# Altium PCB ZMBo.PcbDoc (part 1 of 3)
Units mil, origin at the board's own origin, x right, y up, seen from the top; angles counter-clockwise.
Board outline 6000 x 4000 mil, 4 copper layers (Top Layer, Groun Plane, Power Plane, Bottom Layer); 254 components, 259 nets, 1004 pads, 1790 vias.
Unrouted connection lines stored in the file: 212.
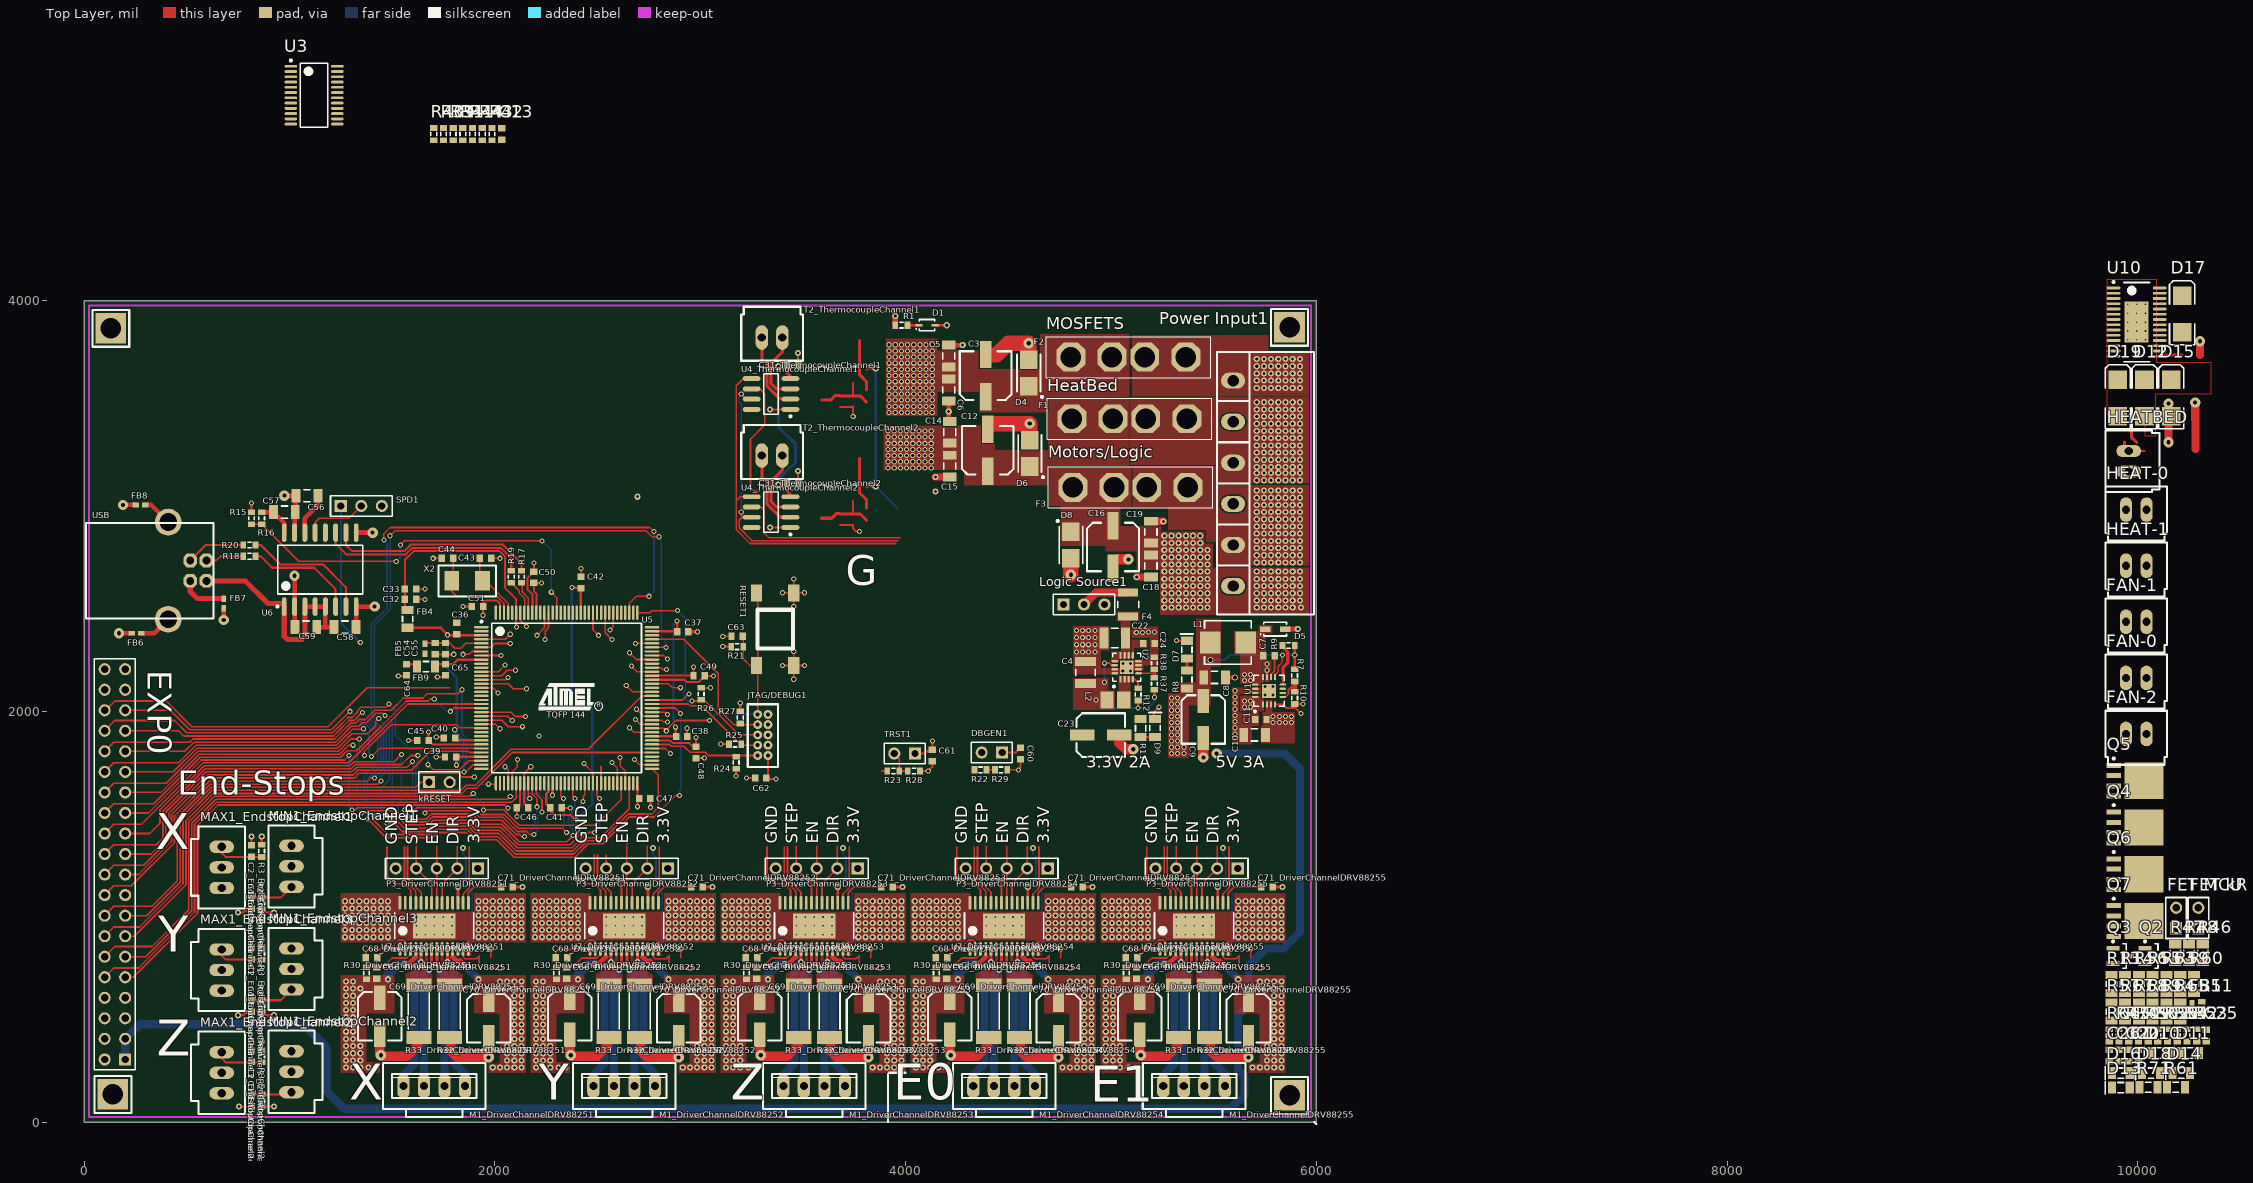
[diagram p0: Top Layer view]
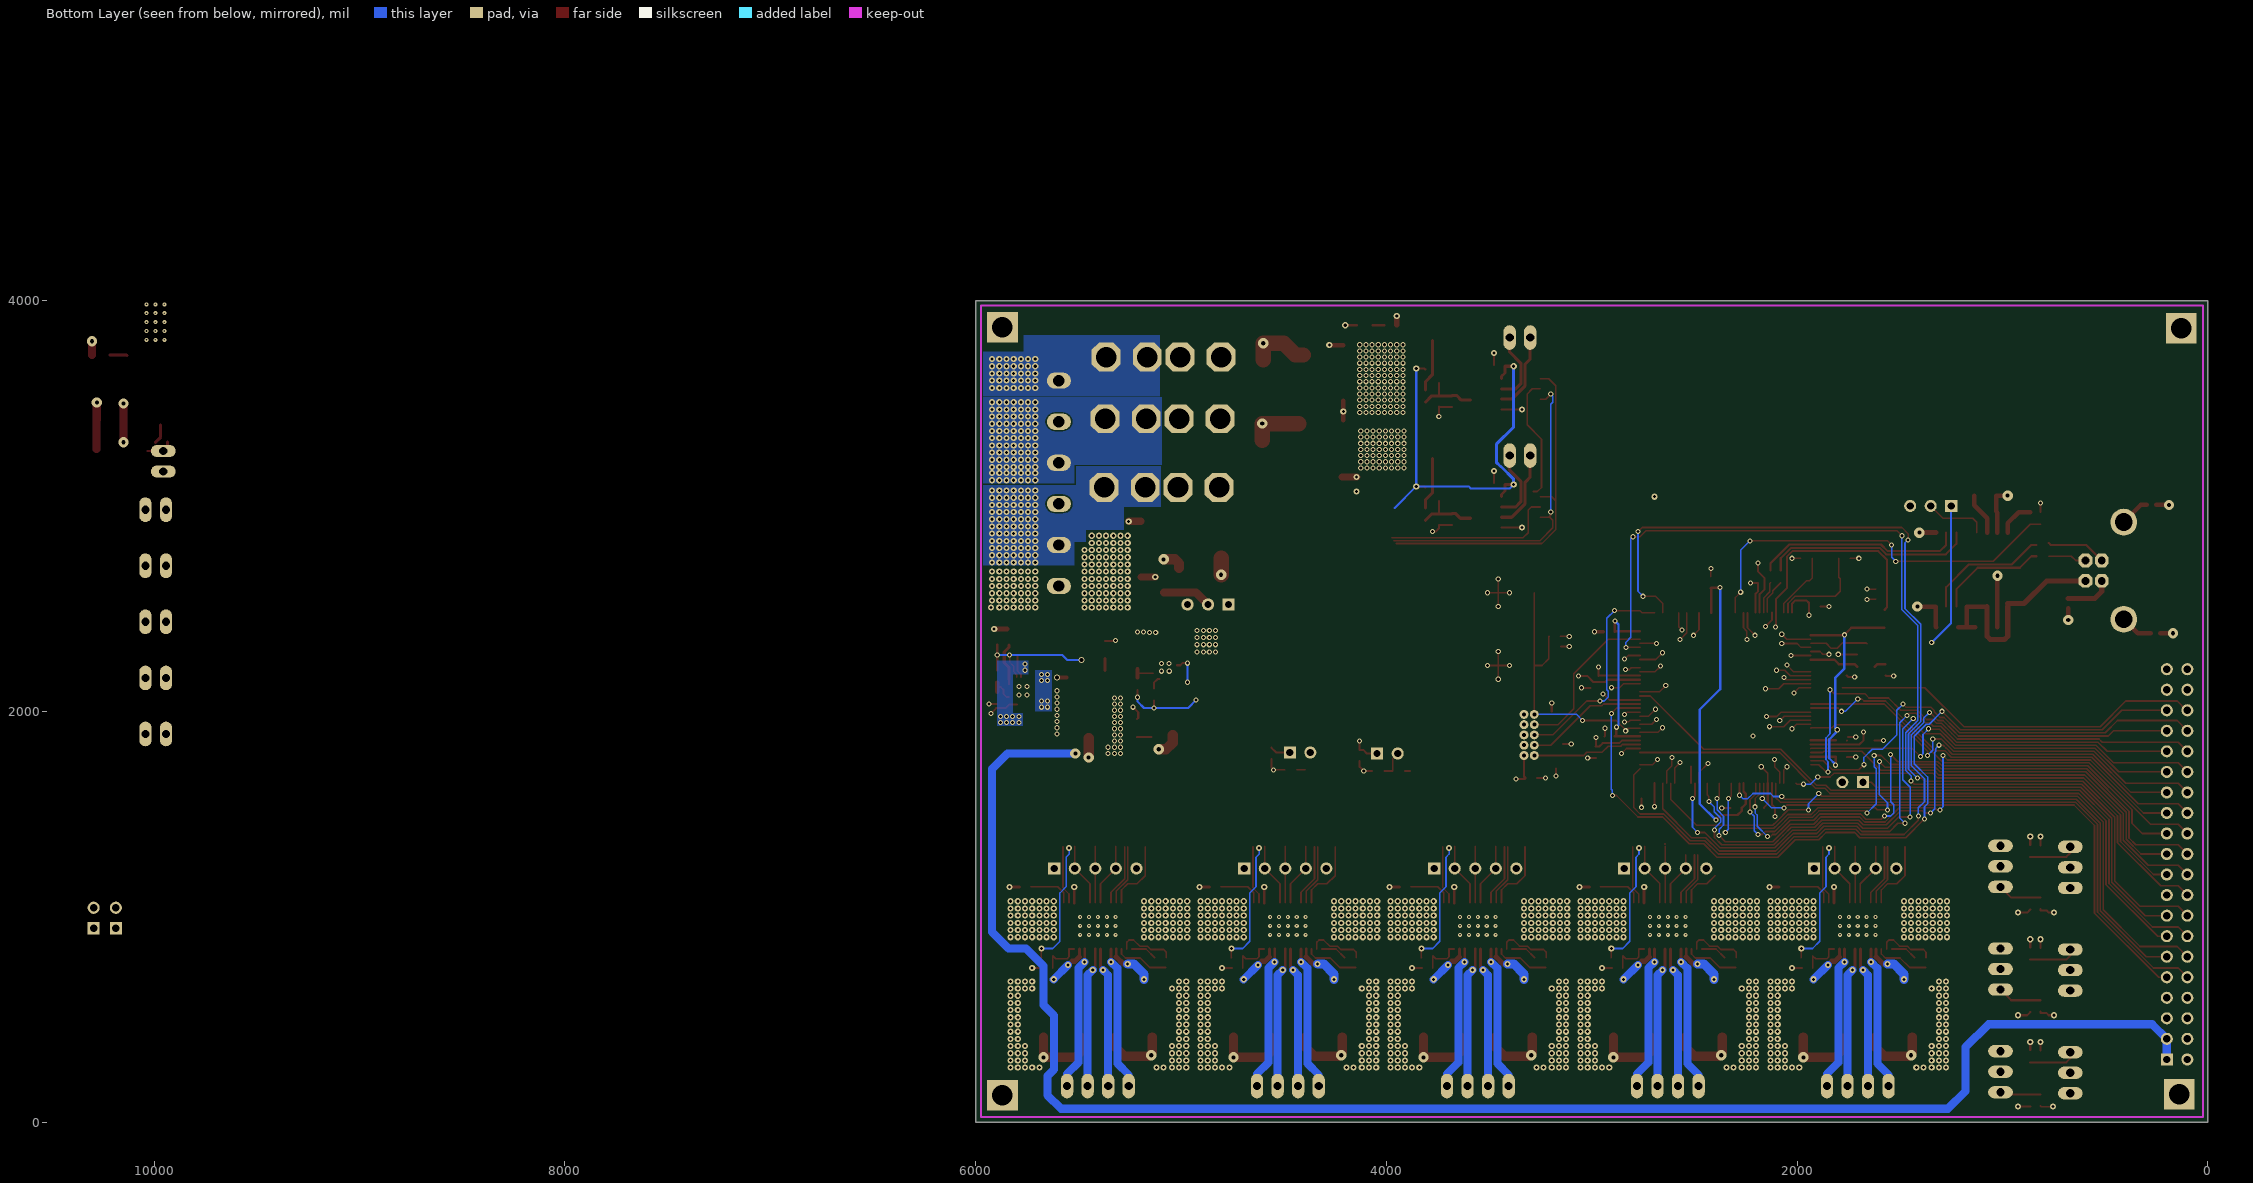
[diagram p1: Bottom Layer view, seen from below]
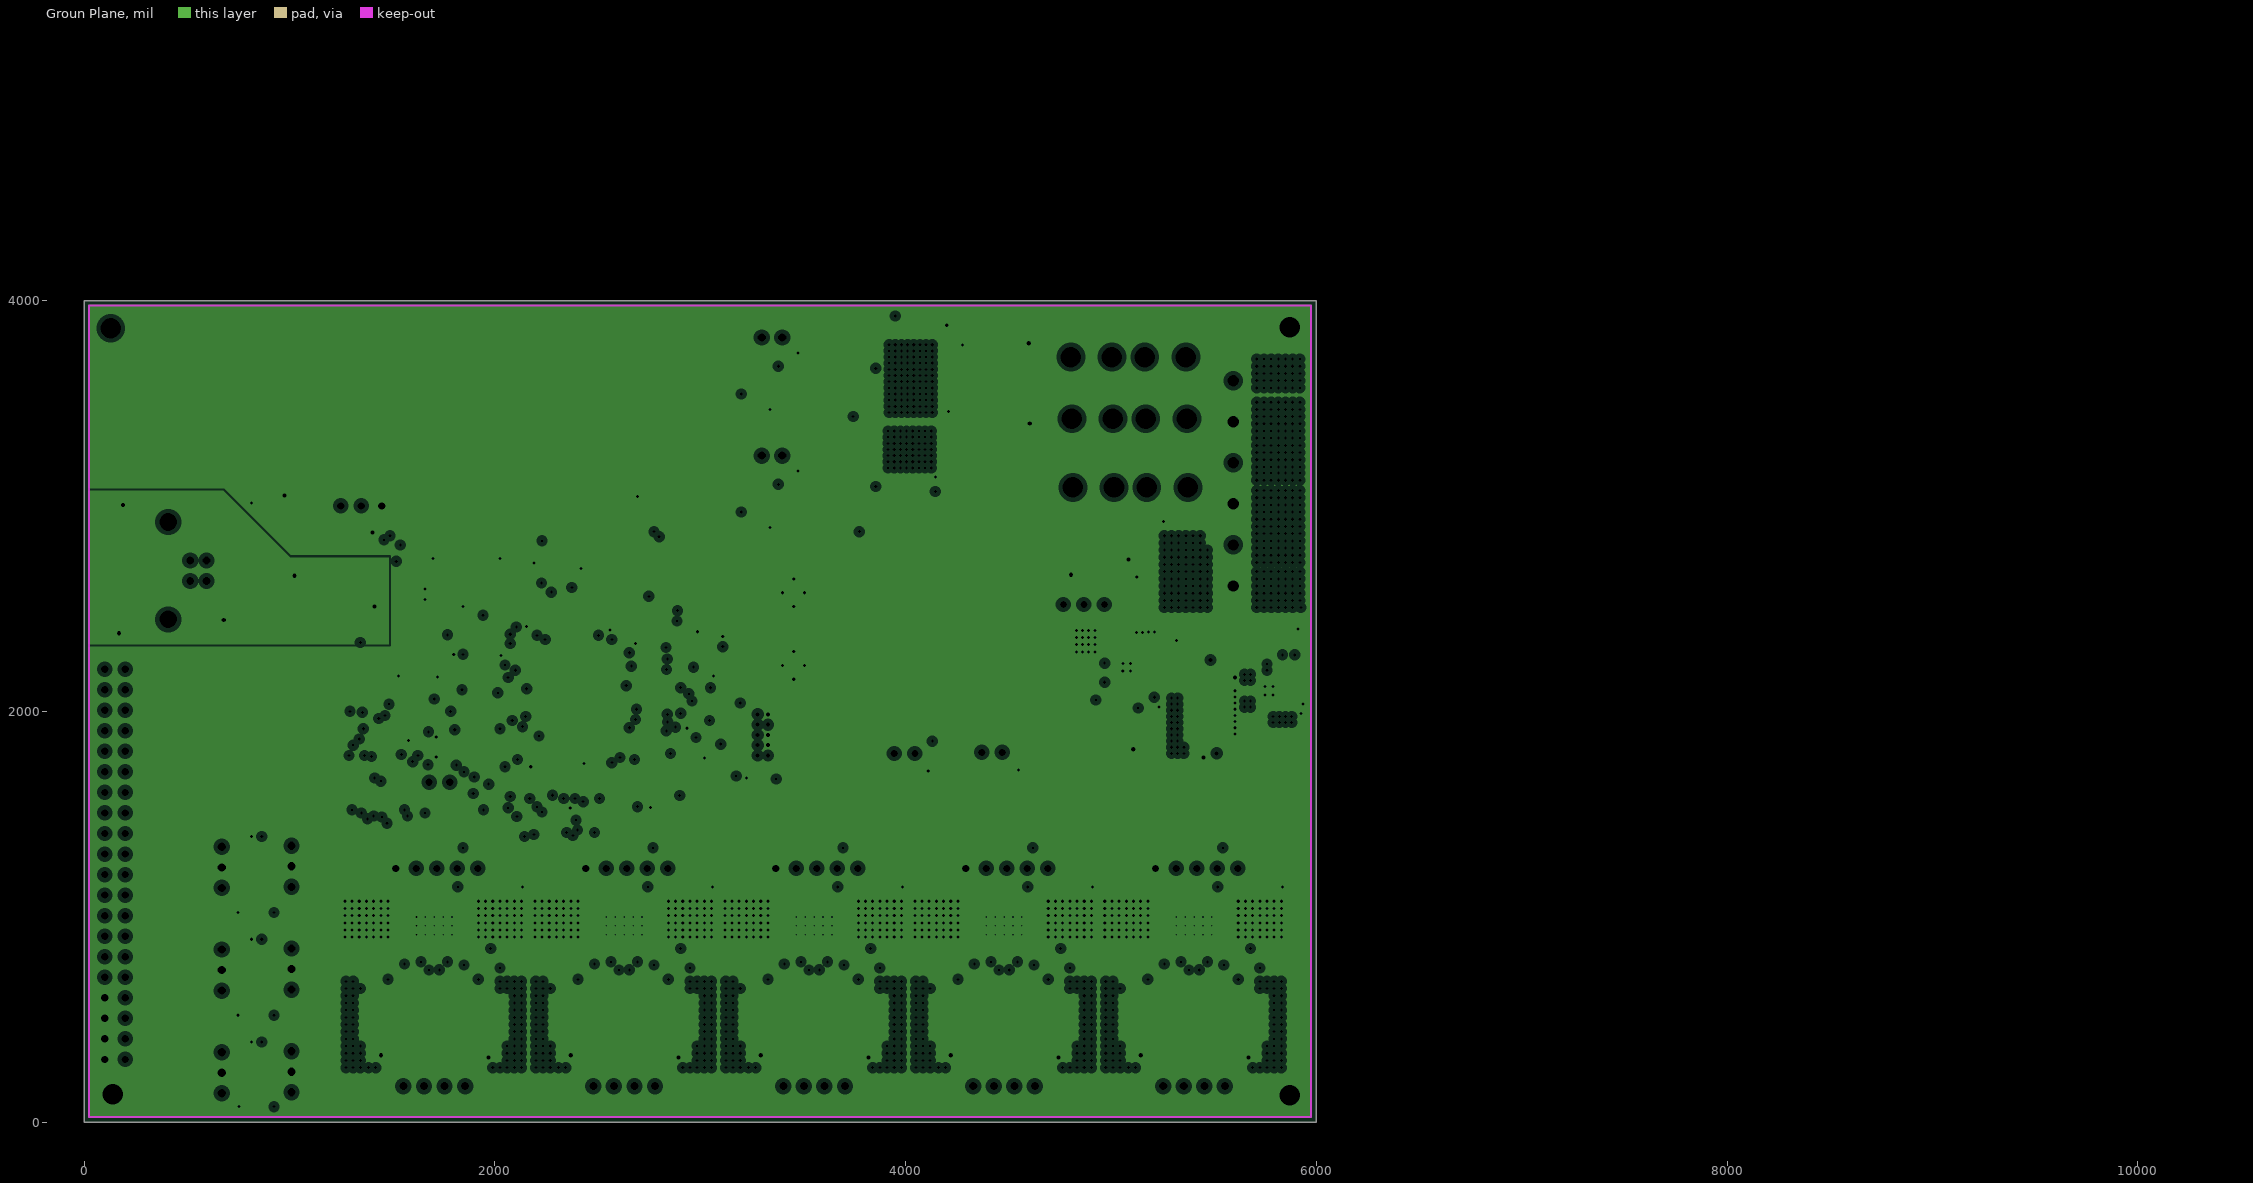
[diagram p2: Groun Plane, clearances drawn from the general rule]
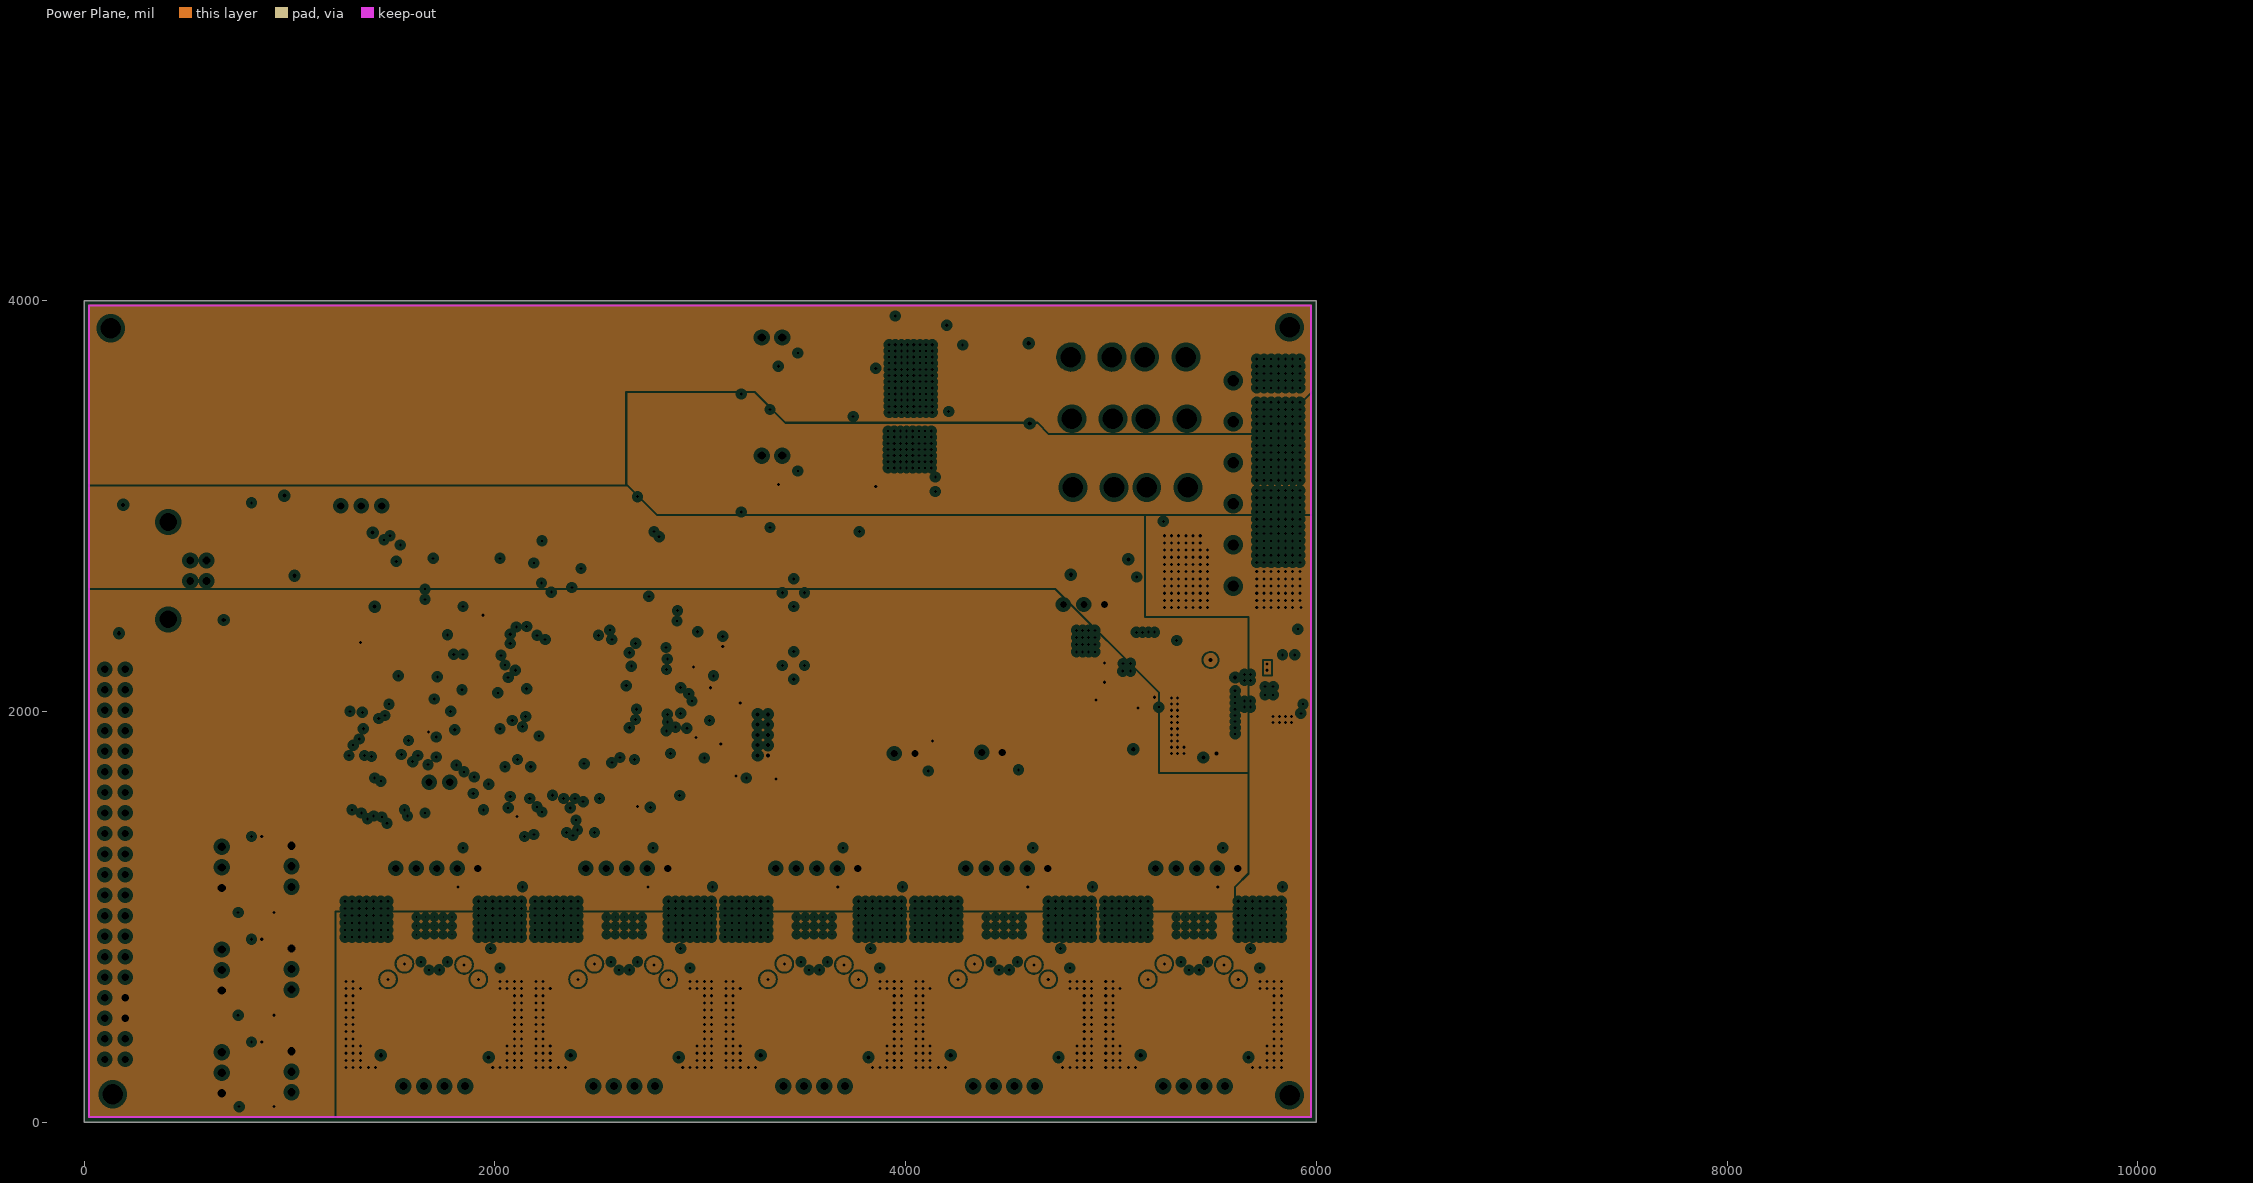
[diagram p3: Power Plane, clearances drawn from the general rule]

## Layer stack, top to bottom
Top Layer: signal copper 1.4
Dielectric: core 12.6, FR-4, Dk 4.8
Groun Plane: plane copper 1.4, net (Multiple Nets)
Dielectric: prepreg 12.6, FR-4, Dk 4.8
Power Plane: plane copper 1.4, net (Multiple Nets)
Dielectric: core 12.6, FR-4, Dk 4.8
Bottom Layer: signal copper 1.4

## Board outline
0,0 6000,0 6000,4000 0,4000

## Design rules (kind name [scope] priority, off if disabled: settings)
Clearance [All] p1: gap=6
ComponentClearance [All] p1: gap=0 collisioncheckmode=3 verticalgap=10 showdistances=FALSE
FanoutControl Fanout_SOIC [(InComponent('U8') AND InComponent('U7'))] p3: bgadir=Out bgaviamode=Centered fanoutstyle=Staggered fanoutdirection=Alternating viagrid=1 // Fanout_SOIC (Default Rule)
FanoutControl Fanout_Small [All] p4: bgadir=Out bgaviamode=Centered fanoutstyle=Auto fanoutdirection=Alternating viagrid=1 // Fanout_Small (Default Rule)
HoleSize [All] p1: absolutevalues=TRUE maxlimit=120 minlimit=1 maxpercent=80.000 minpercent=20.000
MinimumSolderMaskSliver [All] p1 off: minsoldermaskwidth=10
PlaneClearance [All] p1: clearance=20
PlaneConnect [All] p1: planeconnectstyle=Direct reliefexpansion=20 reliefentries=4 reliefconductorwidth=10 reliefairgap=10
PolygonConnect [All] p1: connectstyle=Direct reliefconductorwidth=45 reliefentries=4 polygonreliefangle="90 Angle" airgapwidth=10
RoomDefinition "ATSAM4E16EA_AU Main Controller" [InComponentClass('ATSAM4E16EA_AU Main Controller')] p1: confinementstyle=ConfineIn formatcopy=TRUE lockcomponents=TRUE outline 3175,3100 3175,2850 3900,2850 3900,1900 4700,1900 4700,1500 475,1500 475,2275 0,2275 0,3100
RoomDefinition Designator [InComponentClass('Designator')] p2: confinementstyle=ConfineIn formatcopy=TRUE lockcomponents=FALSE outline 4700,1700 5995,1700 5995,4000 4220,4001 3900,4001 3901,3823 3900,3100 4675,3100 4675,2975 4700,2975
RoomDefinition "U_Offboard Kinen Expansion" [InComponentClass('U_Offboard Kinen Expansion')] p3: confinementstyle=ConfineIn formatcopy=TRUE lockcomponents=TRUE outline 0,0 475,0 475,2275 0,2275
RoomDefinition ThermocoupleChannel2 [InComponentClass('ThermocoupleChannel2')] p4: confinementstyle=ConfineIn formatcopy=TRUE lockcomponents=FALSE outline 3525,2850 3525,3425 3175,3425 3175,2850
RoomDefinition ThermocoupleChannel1 [InComponentClass('ThermocoupleChannel1')] p5: confinementstyle=ConfineIn formatcopy=TRUE lockcomponents=FALSE outline 3525,3425 3525,4000 3175,4000 3175,3425
RoomDefinition "U_MOSFETs and Driver" [InComponentClass('U_MOSFETs and Driver')] p6: confinementstyle=ConfineIn formatcopy=TRUE lockcomponents=TRUE outline 9837.83,-120 12895,-120 12895,4110 9837.83,4110
RoomDefinition EndstopChannel3 [InComponentClass('EndstopChannel3')] p7: confinementstyle=ConfineIn formatcopy=TRUE lockcomponents=TRUE outline 475,500 1200,500 1200,1000 475,1000
RoomDefinition EndstopChannel2 [InComponentClass('EndstopChannel2')] p8: confinementstyle=ConfineIn formatcopy=TRUE lockcomponents=TRUE outline 475,0 1200,0 1200,500 475,500
RoomDefinition EndstopChannel1 [InComponentClass('EndstopChannel1')] p9: confinementstyle=ConfineIn formatcopy=TRUE lockcomponents=TRUE outline 475,1000 1200,1000 1200,1500 475,1500
RoomDefinition DriverChannelDRV88255 [InComponentClass('DriverChannelDRV88255')] p10: confinementstyle=ConfineIn formatcopy=TRUE lockcomponents=TRUE outline 4950,0 5875,0 5875,1350 4950,1350
RoomDefinition DriverChannelDRV88254 [InComponentClass('DriverChannelDRV88254')] p11: confinementstyle=ConfineIn formatcopy=TRUE lockcomponents=TRUE outline 4025,0 4950,0 4950,1350 4025,1350
RoomDefinition DriverChannelDRV88253 [InComponentClass('DriverChannelDRV88253')] p12: confinementstyle=ConfineIn formatcopy=TRUE lockcomponents=TRUE outline 3100,0 4025,0 4025,1350 3100,1350
RoomDefinition DriverChannelDRV88252 [InComponentClass('DriverChannelDRV88252')] p13: confinementstyle=ConfineIn formatcopy=TRUE lockcomponents=TRUE outline 2175,0 3100,0 3100,1350 2175,1350
RoomDefinition DriverChannelDRV88251 [InComponentClass('DriverChannelDRV88251')] p14: confinementstyle=ConfineIn formatcopy=TRUE lockcomponents=TRUE outline 1250,0 2175,0 2175,1350 1250,1350
RoutingVias [All] p1: holewidth=15 width=25 viastyle="Through Hole" minholewidth=15 minwidth=25 maxholewidth=28 maxwidth=50
SilkToSilkClearance [All] p1 off: silktosilkclearance=10
SilkToSolderMaskClearance SilkscreenOverComponentPads [IsPad] p1 off: minsilkscreentomaskgap=10 clearancetoexposedcopper=TRUE
SolderMaskExpansion [All] p1: expansion=4
Width [All] p1: maxlimit=200 minlimit=6 preferedwidth=6 minimp=50.000000 maximp=50.000000 favimp=50.000000
19 further rules are at their usual default settings.

## Classes and differential pairs
component class "U_MOSFETs and Driver": C17 C20 C21 C25 C26 D10 D11 D12 D13 D14 D15 D16 D17 D18 D19 FAN-0 FAN-1 FAN-2 FB1 "FET kRESET" "FET MCU RESET" HEAT-0 HEAT-1 HEATBED Q2 Q3 Q4 Q5 Q6 Q7 R13 R14 R45 R46 R47 R48 R49 R50 R51 R52 R53 R54 R55 R56 R57 R58 R59 R60 R61 R62 R63 R64 R65 R66 R67 R68 R69 R70 R71 U10
channel class "Thermocouple Channel": ThermocoupleChannel1 ThermocoupleChannel2
channel class "Endstop Channel": EndstopChannel1 EndstopChannel2 EndstopChannel3
channel class "Driver Channel DRV8825": DriverChannelDRV88251 DriverChannelDRV88252 DriverChannelDRV88253 DriverChannelDRV88254 DriverChannelDRV88255
net class OVREFBUS[1..2]: OVREF1 OVREF2
component class ThermocoupleChannel2: C31_ThermocoupleChannel2 T2_ThermocoupleChannel2 U4_ThermocoupleChannel2
component class ThermocoupleChannel1: C31_ThermocoupleChannel1 T2_ThermocoupleChannel1 U4_ThermocoupleChannel1
component class EndstopChannel3: C1_EndstopChannel3 C2_EndstopChannel3 MAX1_EndstopChannel3 MIN1_EndstopChannel3 R2_EndstopChannel3 R3_EndstopChannel3
component class EndstopChannel2: C1_EndstopChannel2 C2_EndstopChannel2 MAX1_EndstopChannel2 MIN1_EndstopChannel2 R2_EndstopChannel2 R3_EndstopChannel2
component class EndstopChannel1: C1_EndstopChannel1 C2_EndstopChannel1 MAX1_EndstopChannel1 MIN1_EndstopChannel1 R2_EndstopChannel1 R3_EndstopChannel1
component class DriverChannelDRV88255: C66_DriverChannelDRV88255 C68_DriverChannelDRV88255 C69_DriverChannelDRV88255 C70_DriverChannelDRV88255 C71_DriverChannelDRV88255 M1_DriverChannelDRV88255 P3_DriverChannelDRV88255 R30_DriverChannelDRV88255 R32_DriverChannelDRV88255 R33_DriverChannelDRV88255 U7_DriverChannelDRV88255
component class DriverChannelDRV88254: C66_DriverChannelDRV88254 C68_DriverChannelDRV88254 C69_DriverChannelDRV88254 C70_DriverChannelDRV88254 C71_DriverChannelDRV88254 M1_DriverChannelDRV88254 P3_DriverChannelDRV88254 R30_DriverChannelDRV88254 R32_DriverChannelDRV88254 R33_DriverChannelDRV88254 U7_DriverChannelDRV88254
component class DriverChannelDRV88253: C66_DriverChannelDRV88253 C68_DriverChannelDRV88253 C69_DriverChannelDRV88253 C70_DriverChannelDRV88253 C71_DriverChannelDRV88253 M1_DriverChannelDRV88253 P3_DriverChannelDRV88253 R30_DriverChannelDRV88253 R32_DriverChannelDRV88253 R33_DriverChannelDRV88253 U7_DriverChannelDRV88253
component class DriverChannelDRV88252: C66_DriverChannelDRV88252 C68_DriverChannelDRV88252 C69_DriverChannelDRV88252 C70_DriverChannelDRV88252 C71_DriverChannelDRV88252 M1_DriverChannelDRV88252 P3_DriverChannelDRV88252 R30_DriverChannelDRV88252 R32_DriverChannelDRV88252 R33_DriverChannelDRV88252 U7_DriverChannelDRV88252
component class DriverChannelDRV88251: C66_DriverChannelDRV88251 C68_DriverChannelDRV88251 C69_DriverChannelDRV88251 C70_DriverChannelDRV88251 C71_DriverChannelDRV88251 M1_DriverChannelDRV88251 P3_DriverChannelDRV88251 R30_DriverChannelDRV88251 R32_DriverChannelDRV88251 R33_DriverChannelDRV88251 U7_DriverChannelDRV88251
component class "ATSAM4E16EA_AU Main Controller": C13 C32 C33 C36 C37 C38 C39 C40 C41 C42 C43 C44 C45 C46 C47 C48 C49 C50 C51 C54 C55 C56 C57 C58 C59 C60 C61 C62 C63 C64 C65 DBGEN1 FB4 FB5 FB6 FB7 FB8 FB9 JTAG/DEBUG1 kRESET R15 R16 R17 R18 R19 R20 R21 R22 R23 R24 R25 R26 R27 R28 R29 R31 R39 R40 R41 R42 R43 R44 RESET1 SPD1 TRST1 U3 U5 U6 USB X2
component class Designator: C3 C4 C5 C6 C7 C8 C9 C10 C11 C12 C14 C15 C16 C18 C19 C22 C23 C24 D1 D4 D5 D6 D7 D8 D9 F1 F2 F3 F4 L1 L2 "Logic Source1" "Power Input1" R1 R7 R8 R9 R10 R11 R12 R37 R38 U1 U2
component class "U_Offboard Kinen Expansion": EXP0
net class MAX_ES_BUS[1..3]: MAX_ES0
net class MIN_ES_BUS[1..3]: MIN_ES0
net class MISO[1..2]: MISO0 MISO1 MISO2
net class SCLK[1..2]: SCLK0 SCLK1 SCLK2
net class TC_CS_BUS[1..2]: TC_CS0
net class THERM_ANBUS[1..2]: THERM_AN0

## Components (designator, comment, footprint, x,y, rotation, side; value= is the part's Value field where it differs from the comment)
C1_EndstopChannel1 "0603" 1608[0603] 815,1065.47 r270 top (schematic designator C1)
C1_EndstopChannel2 "0603" 1608[0603] 815,105.47 r270 top (schematic designator C1)
C1_EndstopChannel3 "0603" 1608[0603] 815,565.47 r270 top (schematic designator C1)
C2_EndstopChannel1 "0603" 1608[0603] 815,1320 r90 top (schematic designator C2)
C2_EndstopChannel2 "0603" 1608[0603] 815,320 r90 top (schematic designator C2)
C2_EndstopChannel3 "0603" 1608[0603] 815,820 r90 top (schematic designator C2)
C3 "VAS D" "Panasonic VS D" 4390,3635 r270 top
C4 "1210" C1210 4875.58,2189.31 r90 top
C5 "1206" C1206 4210,3730 r270 top
C6 "1206" C1206 4210,3565 r90 top
C7 "Cap Semi" 1608[0603] 5770,2270 r0 top
C8 "Cap Semi" C1206 5505,2165 r180 top
C9 "VS C" "Panasonic VS C" 5565,1840 r90 top
C10 "Cap Semi" C1206 5700,1885 r0 top
C11 "Cap Semi" 1608[0603] 5730,1960 r0 top
C12 "VAS D" "Panasonic VS D" 4400,3271.02 r270 top
C13 "Cap Semi" 1608[0603] 2033.39,4810.79 r90 top
C14 "1206" C1206 4215,3358.66 r270 top
C15 "1206" C1206 4215,3193.66 r90 top
C16 "VAS D" "Panasonic VS D" 5010,2800 r90 top
C17 "0603" 1608[0603] 9908.7,323.33 r90 top
C18 "1206" C1206 5195,2707.36 r90 top
C19 "1206" C1206 5195,2872.36 r270 top
C20 "0603" 1608[0603] 9955.94,323.33 r90 top
C21 "0603" 1608[0603] 10003.19,323.33 r90 top
C22 "1210" C1210 5018.58,2356.31 r180 top
C23 "VS C" "Panasonic VS C" 5070.58,1999.31 r180 top
C24 "0603" 1608[0603] 5185.58,2330.31 r180 top
C25 "0603" 1608[0603] 10333.9,421.76 r90 top
C26 "0603" 1608[0603] 9861.46,323.33 r90 top
C31_ThermocoupleChannel1 "Cap Semi" 1608[0603] 3450.51,3685 r180 top (schematic designator C31)
C31_ThermocoupleChannel2 "Cap Semi" 1608[0603] 3450.51,3110 r180 top (schematic designator C31)
C32 "0603" 1608[0603] 1590,2545 r180 top
C33 "0603" 1608[0603] 1590,2595 r180 top
C36 "0603" 1608[0603] 1815,2402.56 r270 top
C37 "0603" 1608[0603] 2915,2387.56 r180 top
C38 "0603" 1608[0603] 2910,1877.56 r180 top
C39 "0603" 1608[0603] 1785,1777.56 r0 top
C40 "0603" 1608[0603] 1780,1870 r0 top
C41 "0603" 1608[0603] 2297.44,1530 r180 top
C42 "0603" 1608[0603] 2420,2627.56 r270 top
C43 "0603" 1608[0603] 1955,2745 r180 top
C44 "0603" 1608[0603] 1770,2745 r0 top
C45 "0603" 1608[0603] 1650,1857.56 r0 top
C46 "0603" 1608[0603] 2135,1530 r180 top
C47 "0603" 1608[0603] 2730,1575 r180 top
C48 "0603" 1608[0603] 2980,1800 r90 top
C49 "0603" 1608[0603] 2995,2172.56 r180 top
C50 "0603" 1608[0603] 2190,2652.56 r270 top
C51 "0603" 1608[0603] 1915,2510 r0 top
C54 "0603" 1608[0603] 1710,2305 r90 top
C55 "0603" 1608[0603] 1760,2305 r90 top
C56 "1206" C1206 1085,3050 r0 top
C57 "1206" C1206 975,2970 r180 top
C58 "1206" C1206 1270,2410 r180 top
C59 "1206" C1206 1080,2410 r0 top
C60 "Cap Semi" 1608[0603] 4560,1795 r90 top
C61 "Cap Semi" 1608[0603] 4130.47,1784.53 r90 top
C62 "Cap Semi" 1608[0603] 3295,1675 r0 top
C63 "Cap Semi" 1608[0603] 3180,2365 r0 top
C64 "0603" 1608[0603] 1570,2202.56 r90 top
C65 "0603" 1608[0603] 1760,2202.56 r90 top
C66_DriverChannelDRV88251 "0603" 1608[0603] 1425,725 r90 top (schematic designator C66)
C66_DriverChannelDRV88252 "0603" 1608[0603] 2350,725 r90 top (schematic designator C66)
C66_DriverChannelDRV88253 "0603" 1608[0603] 3275,725 r90 top (schematic designator C66)
C66_DriverChannelDRV88254 "0603" 1608[0603] 4200,725 r90 top (schematic designator C66)
C66_DriverChannelDRV88255 "0603" 1608[0603] 5125,725 r90 top (schematic designator C66)
C68_DriverChannelDRV88251 "0603" 1608[0603] 1400,800 r180 top (schematic designator C68)
C68_DriverChannelDRV88252 "0603" 1608[0603] 2325,800 r180 top (schematic designator C68)
C68_DriverChannelDRV88253 "0603" 1608[0603] 3250,800 r180 top (schematic designator C68)
C68_DriverChannelDRV88254 "0603" 1608[0603] 4175,800 r180 top (schematic designator C68)
C68_DriverChannelDRV88255 "0603" 1608[0603] 5100,800 r180 top (schematic designator C68)
C69_DriverChannelDRV88251 "VS C" "Panasonic VS C" 1555,395 r90 top (schematic designator C69)
C69_DriverChannelDRV88252 "VS C" "Panasonic VS C" 2480,395 r90 top (schematic designator C69)
C69_DriverChannelDRV88253 "VS C" "Panasonic VS C" 3405,395 r90 top (schematic designator C69)
C69_DriverChannelDRV88254 "VS C" "Panasonic VS C" 4330,395 r90 top (schematic designator C69)
C69_DriverChannelDRV88255 "VS C" "Panasonic VS C" 5255,395 r90 top (schematic designator C69)
C70_DriverChannelDRV88251 "VS C" "Panasonic VS C" 2085,385 r90 top (schematic designator C70)
C70_DriverChannelDRV88252 "VS C" "Panasonic VS C" 3010,385 r90 top (schematic designator C70)
C70_DriverChannelDRV88253 "VS C" "Panasonic VS C" 3935,385 r90 top (schematic designator C70)
C70_DriverChannelDRV88254 "VS C" "Panasonic VS C" 4860,385 r90 top (schematic designator C70)
C70_DriverChannelDRV88255 "VS C" "Panasonic VS C" 5785,385 r90 top (schematic designator C70)
C71_DriverChannelDRV88251 "0603" 1608[0603] 2060,1145 r180 top (schematic designator C71)
C71_DriverChannelDRV88252 "0603" 1608[0603] 2985,1145 r180 top (schematic designator C71)
C71_DriverChannelDRV88253 "0603" 1608[0603] 3910,1145 r180 top (schematic designator C71)
C71_DriverChannelDRV88254 "0603" 1608[0603] 4835,1145 r180 top (schematic designator C71)
C71_DriverChannelDRV88255 "0603" 1608[0603] 5760,1145 r180 top (schematic designator C71)
D1 "SZMM3Z4V7T1G" SZMM3Z4V7T1G 4105,3880 r180 top
D4 "SK310A-TP" SK310A-TP 4600,3647.36 r270 top
D5 "PMEG1030EH_EJ" PMEG1030EH_EJ 5800,2400 r180 top
D6 "SK310A-TP" SK310A-TP 4605,3256.02 r270 top
D7 "LED2" "SM 0805 polarized" 5413.5,2380 r270 top
D8 "SK310A-TP" SK310A-TP 4805,2810 r90 top
D9 "LED2" "SM 0805 polarized" 5258.58,1998.31 r270 top
D10 "LED1" "SM 0805 polarized" 10026.87,380.35 r0 top
D11 "LED1" "SM 0805 polarized" 10173.85,380.35 r0 top
D12 "B240A-13-F" SMB 10032.72,3526.18 r90 top
D13 "LED1" "SM 0805 polarized" 9837.9,210.94 r0 top
D14 "LED1" "SM 0805 polarized" 10131.85,281.93 r0 top
D15 "B240A-13-F" SMB 10162.64,3526.18 r90 top
D16 "LED1" "SM 0805 polarized" 9837.9,281.93 r0 top
D17 "B240A-13-F" SMB 10215.79,3934.65 r90 top
D18 "LED1" "SM 0805 polarized" 9984.87,281.93 r0 top
D19 "B240A-13-F" SMB 9902.8,3526.18 r90 top
DBGEN1 "Header 2" HDR1X2 4470.39,1799.45 r180 top
EXP0 "Header 20X2" HDR2X20 200,305 r90 top locked
F1 "3522-2" 3522-2 5090,3425 r180 top
F2 "3522-2" 3522-2 5085,3725 r180 top
F3 "3522-2" 3522-2 5095,3090 r180 top
F4 "LittleFuse F1210" F1210_M 5083.58,2520.04 r90 top
FAN-0 "Molex 70543-02" 70543-02 9992.83,2162.64 r0 top
FAN-1 "Molex 70543-02" 70543-02 9992.83,2435.64 r0 top
FAN-2 "Molex 70543-02" 70543-02 9992.83,1889.64 r0 top
FB1 "BLM15HG601SN1D" BLM18PG121SN1D 10263.79,553.77 r90 top
FB4 "MH2029-300Y" "SM 0805 - gap trimmed" 1575,2450 r90 top
FB5 "BLM15HG601SN1D" BLM18PG121SN1D 1660,2305 r90 top
FB6 "BLM15HG601SN1D" BLM18PG121SN1D 255,2380 r0 top
FB7 "BLM15HG601SN1D" BLM18PG121SN1D 680,2525 r90 top
FB8 "BLM15HG601SN1D" BLM18PG121SN1D 275,3005 r0 top
FB9 "MH2029-300Y" "SM 0805 - gap trimmed" 1665,2217.56 r0 top
"FET kRESET" "Header 2" HDR1X2 10294.92,943.46 r90 top
"FET MCU RESET" "Header 2" HDR1X2 10187.05,943.46 r90 top
HEAT-0 "Molex 70543-02" 70543-02 9992.83,2981.64 r0 top
HEAT-1 "Molex 70543-02" 70543-02 9992.83,2708.64 r0 top
HEATBED "Molex 70543-02" 70543-02 9955.83,3217.64 r90 top
JTAG/DEBUG1 "S9015E-05-ND" S9015E-05-ND 3330,1985 r270 top
kRESET "Header 2" HDR1X2 1680,1655 r0 top
L1 "Inductor" CIP0530LR3R3 5570,2335 r180 top
L2 "VLS252012T-2R2M1R3" VLS252012T-2R2M1R3 5021.58,2054.31 r180 top
"Logic Source1" "Header 3" HDR1X3 4768.58,2520.04 r0 top
M1_DriverChannelDRV88251 "Molex 0705430003" 4POL254 1705,175 r0 top (schematic designator M1)
M1_DriverChannelDRV88252 "Molex 0705430003" 4POL254 2630,175 r0 top (schematic designator M1)
M1_DriverChannelDRV88253 "Molex 0705430003" 4POL254 3555,175 r0 top (schematic designator M1)
M1_DriverChannelDRV88254 "Molex 0705430003" 4POL254 4480,175 r0 top (schematic designator M1)
M1_DriverChannelDRV88255 "Molex 0705430003" 4POL254 5405,175 r0 top (schematic designator M1)
MAX1_EndstopChannel1 "Molex 70543-03" 70543-03 670,1240 r270 top (schematic designator MAX1)
MAX1_EndstopChannel2 "Molex 70543-03" 70543-03 670,240 r270 top (schematic designator MAX1)
MAX1_EndstopChannel3 "Molex 70543-03" 70543-03 670,740 r270 top (schematic designator MAX1)
MIN1_EndstopChannel1 "Molex 70543-03" 70543-03 1010,1245 r90 top (schematic designator MIN1)
MIN1_EndstopChannel2 "Molex 70543-03" 70543-03 1010,245 r90 top (schematic designator MIN1)
MIN1_EndstopChannel3 "Molex 70543-03" 70543-03 1010,745 r90 top (schematic designator MIN1)
P3_DriverChannelDRV88251 "Header 5" HDR1X5 1917.5,1235 r180 top (schematic designator P3)
P3_DriverChannelDRV88252 "Header 5" HDR1X5 2842.5,1235 r180 top (schematic designator P3)
P3_DriverChannelDRV88253 "Header 5" HDR1X5 3767.5,1235 r180 top (schematic designator P3)
P3_DriverChannelDRV88254 "Header 5" HDR1X5 4692.5,1235 r180 top (schematic designator P3)
P3_DriverChannelDRV88255 "Header 5" HDR1X5 5617.5,1235 r180 top (schematic designator P3)
"Power Input1" "con-phoenix-508" con-phoenix-508-6 5595,2610 r0 top
Q2 "IRML6346TRPBF" IRLML6346 10071.1,808.82 r0 top
Q3 "IRML6346TRPBF" IRLML6346 9915.59,808.82 r0 top
Q4 "PSMN7R0-60YS" PSMN7R0-60YS 9985.47,1434.21 r0 top
Q5 "PSMN7R0-60YS" PSMN7R0-60YS 9985.47,1661.77 r0 top
Q6 "PSMN7R0-60YS" PSMN7R0-60YS 9985.47,1206.65 r0 top
Q7 "PSMN7R0-60YS" PSMN7R0-60YS 9985.47,979.09 r0 top
R1 "Res3" J1-0603 3980,3880 r180 top
R2_EndstopChannel1 "0603" J1-0603 865,1065.47 r90 top (schematic designator R2)
R2_EndstopChannel2 "0603" J1-0603 865,105.47 r90 top (schematic designator R2)
R2_EndstopChannel3 "0603" J1-0603 865,565.47 r90 top (schematic designator R2)
R3_EndstopChannel1 "0603" J1-0603 865,1320.47 r270 top (schematic designator R3)
R3_EndstopChannel2 "0603" J1-0603 865,320.47 r270 top (schematic designator R3)
R3_EndstopChannel3 "0603" J1-0603 865,820.47 r270 top (schematic designator R3)
R7 "Res3" J1-0603 5895,2175 r90 top
R8 "Res3" "SM 0805 - gap trimmed" 5370,2155 r270 top
R9 "Res3" J1-0603 5865,2320 r180 top
R10 "Res3" J1-0603 5895,2065 r90 top
R11 "Res3" "SM 0805 - gap trimmed" 5144.58,1918.31 r90 top
R12 "0603" J1-0603 5132.58,2082.31 r270 top
R13 "0805" "SM 0805 - gap trimmed" 9871.36,671.94 r90 top
R14 "0805" "SM 0805 - gap trimmed" 9938.42,671.94 r90 top
R15 "0603" J1-0603 815,2940 r90 top
R16 "0603" J1-0603 865,2940 r90 top
R17 "0603" J1-0603 2130,2655 r90 top
R18 "0603" J1-0603 805,2755 r180 top
R19 "0603" J1-0603 2080,2655 r90 top
R20 "0603" J1-0603 805,2810 r180 top
R21 "Res3" J1-0603 3180,2315 r180 top
R22 "0603" J1-0603 4365,1715 r0 top
R23 "Res3" J1-0603 3940.47,1709.53 r0 top
R24 "0603" J1-0603 3175,1750 r270 top
R25 "0603" J1-0603 3170,1840 r180 top
R26 "0603" J1-0603 3005,2085 r90 top
R27 "0603" J1-0603 3195,1970 r90 top
R28 "0603" J1-0603 4040.47,1709.53 r180 top
R29 "0603" J1-0603 4465,1715 r0 top
R30_DriverChannelDRV88251 "0603" J1-0603 1375,725 r90 top (schematic designator R30)
R30_DriverChannelDRV88252 "0603" J1-0603 2300,725 r90 top (schematic designator R30)
R30_DriverChannelDRV88253 "0603" J1-0603 3225,725 r90 top (schematic designator R30)
R30_DriverChannelDRV88254 "0603" J1-0603 4150,725 r90 top (schematic designator R30)
R30_DriverChannelDRV88255 "0603" J1-0603 5075,725 r90 top (schematic designator R30)
R31 "Res3" J1-0603 1797.17,4810.79 r90 top
R32_DriverChannelDRV88251 "2512" Resistor2512 1780,540 r90 top (schematic designator R32)
R32_DriverChannelDRV88252 "2512" Resistor2512 2705,540 r90 top (schematic designator R32)
R32_DriverChannelDRV88253 "2512" Resistor2512 3630,540 r90 top (schematic designator R32)
R32_DriverChannelDRV88254 "2512" Resistor2512 4555,540 r90 top (schematic designator R32)
R32_DriverChannelDRV88255 "2512" Resistor2512 5480,540 r90 top (schematic designator R32)
R33_DriverChannelDRV88251 "2512" Resistor2512 1630,540 r90 top (schematic designator R33)
R33_DriverChannelDRV88252 "2512" Resistor2512 2555,540 r90 top (schematic designator R33)
R33_DriverChannelDRV88253 "2512" Resistor2512 3480,540 r90 top (schematic designator R33)
R33_DriverChannelDRV88254 "2512" Resistor2512 4405,540 r90 top (schematic designator R33)
R33_DriverChannelDRV88255 "2512" Resistor2512 5330,540 r90 top (schematic designator R33)
R37 "0603" J1-0603 5211.58,2134.31 r270 top
R38 "0603" J1-0603 5211.58,2234.31 r270 top
R39 "0603" J1-0603 1749.92,4810.79 r90 top
R40 "0603" J1-0603 1702.68,4810.79 r90 top
R41 "0603" J1-0603 1844.41,4810.79 r90 top
R42 "0603" J1-0603 1986.14,4810.79 r90 top
R43 "0603" J1-0603 1938.9,4810.79 r90 top
R44 "0603" J1-0603 1891.65,4810.79 r90 top
R45 "0603" J1-0603 9908.7,421.76 r90 top
R46 "0805" "SM 0805 - gap trimmed" 10316.5,822.54 r90 top
R47 "0805" "SM 0805 - gap trimmed" 10182.39,822.54 r90 top
R48 "0805" "SM 0805 - gap trimmed" 10249.44,822.54 r90 top
R49 "0603" J1-0603 10003.19,421.76 r90 top
R50 "0603" J1-0603 10050.43,421.76 r90 top
R51 "0603" J1-0603 10311.03,555.74 r90 top
R52 "0603" J1-0603 10239.41,421.76 r90 top
R53 "0603" J1-0603 10286.65,421.76 r90 top
R54 "0603" J1-0603 10192.17,421.76 r90 top
R55 "0805" "SM 0805 - gap trimmed" 10072.53,671.94 r90 top
R56 "0805" "SM 0805 - gap trimmed" 10005.47,671.94 r90 top
R57 "0805" "SM 0805 - gap trimmed" 9871.36,537.96 r90 top
R58 "0603" J1-0603 10144.92,421.76 r90 top
R59 "0805" "SM 0805 - gap trimmed" 10206.64,671.94 r90 top
R60 "0805" "SM 0805 - gap trimmed" 10273.69,671.94 r90 top
R61 "0805" "SM 0805 - gap trimmed" 10185.79,169.6 r0 top
R62 "0603" J1-0603 10097.68,421.76 r90 top
R63 "0805" "SM 0805 - gap trimmed" 10139.58,671.94 r90 top
R64 "0805" "SM 0805 - gap trimmed" 10139.58,537.96 r90 top
R65 "0805" "SM 0805 - gap trimmed" 10206.64,537.96 r90 top
R66 "0603" J1-0603 9861.46,421.76 r90 top
R67 "0805" "SM 0805 - gap trimmed" 9938.42,537.96 r90 top
R68 "0805" "SM 0805 - gap trimmed" 10005.47,537.96 r90 top
R69 "0805" "SM 0805 - gap trimmed" 10072.53,537.96 r90 top
R70 "0603" J1-0603 9955.94,421.76 r90 top
R71 "0805" "SM 0805 - gap trimmed" 10051.8,169.6 r0 top
RESET1 "Tactile Switch" TL3301 3365,2400 r0 top
SPD1 "Header 3" HDR1X3 1250,3000 r0 top
T2_ThermocoupleChannel1 "Molex 70543-02" 70543-02 3350,3820 r180 top (schematic designator T2)
T2_ThermocoupleChannel2 "Molex 70543-02" 70543-02 3350,3245 r180 top (schematic designator T2)
TRST1 "Header 2" HDR1X2 4045.47,1794.53 r180 top
U1 "MIC24085" MIC24085-AYML 5770,2100 r90 top
U2 "TPS62142RGTT" RGT16-1700X1700TP 5076.58,2214.31 r90 top
U3 "AD5206" "AD5206 & AD5204" 1120,5000 r0 top
U4_ThermocoupleChannel1 "MAX31855EASA+" MAXM-S8+4_N 3345,3545 r180 top (schematic designator U4)
U4_ThermocoupleChannel2 "MAX31855EASA+" MAXM-S8+4_N 3345,2970 r180 top (schematic designator U4)
U5 "ATSAM4E16EA-AU" LQFP144_N 2350,2065 r0 top locked
U6 "ADuM4160" ADuM4160 1150,2690 r90 top
U7_DriverChannelDRV88251 "DRV8825" DRV8825 1705,955 r90 top (schematic designator U7)
U7_DriverChannelDRV88252 "DRV8825" DRV8825 2630,955 r90 top (schematic designator U7)
U7_DriverChannelDRV88253 "DRV8825" DRV8825 3555,955 r90 top (schematic designator U7)
U7_DriverChannelDRV88254 "DRV8825" DRV8825 4480,955 r90 top (schematic designator U7)
U7_DriverChannelDRV88255 "DRV8825" DRV8825 5405,955 r90 top (schematic designator U7)
U10 "Allegro A3944" "A3944 28 Pin TSSOP" 9994.33,3895.28 r0 top
USB "USB-B" PN61729 410,2685 r270 top
X2 "445C35A12M00000" 445C35A12M00000 1940,2635 r180 top

## Footprints (in the part's own frame and the unit in brackets; to place one, negate y for a bottom-side part, rotate by r counter-clockwise, add the part's x,y. Pads: shape width x height; smd on the part's side, far side on the other; paste and mask are expansions set on the pad)
4POL254 [mil]
  oval 60x120 hole 40: 1(-150,0) 2(-50,0) 3(50,0) 4(150,0)
  silkscreen extent -250,-150 250,113, body extent -250,-150 250,113, height 454
445C35A12M00000 [mm] "Crystal Oscillator"
  rect 1.8x2.4 smd: 1(0,0) 2(3.8,0)
  silkscreen extent -1.65,-1.91 5.46,1.91, body extent -1.27,-1.52 5.08,1.52, height 1
1608[0603] [mm] "Chip Capacitor, Body 1.6x0.8mm, IPC High Density"
  rect 0.8x0.9 smd: 1(-0.7,0) 2(0.7,0)
  body extent -0.87,-0.48 0.87,0.48, height 1.3
3522-2 [mil] "3522-2"
  oct 140x140 hole 100: 1(-280,0) 1(-80,0) 2(80,0) 2(280,0)
  silkscreen extent -400,-100 400,100, body extent -402,-103 402,103, height 299
70543-02 [mil]
  oval 60x120 hole 40: 1(-50,0) 2(50,0)
  silkscreen extent -150,-150 150,113, body extent -150,-150 150,113, height 450
70543-03 [mil]
  oval 60x120 hole 40: 1(-100,0) 2(0,0) 3(100,0)
  silkscreen extent -200,-150 200,113, body extent -200,-150 200,113, height 450
"A3944 28 Pin TSSOP" [mm] "TSOP, 28-Leads, Body 9.70x4.40mm, Pitch 0.65mm, Thermal Pad 5.08.2x3.00.2mm, IPC Medium Density"
  oval 1.7x0.35 smd: 1(-2.85,4.225) 2(-2.85,3.575) 3(-2.85,2.925) 4(-2.85,2.275) 5(-2.85,1.625) 6(-2.85,0.975) 7(-2.85,0.325) 8(-2.85,-0.325) 9(-2.85,-0.975) 10(-2.85,-1.625) 11(-2.85,-2.275) 12(-2.85,-2.925) 13(-2.85,-3.575) 14(-2.85,-4.225) 15(2.85,-4.225) 16(2.85,-3.575) 17(2.85,-2.925) 18(2.85,-2.275) 19(2.85,-1.625) 20(2.85,-0.975) 21(2.85,-0.325) 22(2.85,0.325) 23(2.85,0.975) 24(2.85,1.625) 25(2.85,2.275) 26(2.85,2.925) 27(2.85,3.575) 28(2.85,4.225)
  rect 3x5.08 smd: 29(0,0)
  silkscreen extent -2.97,-4.9 1.6,5.07, body extent -2.25,-4.9 2.25,4.9, height 1.2
"AD5206 & AD5204" [mm] "SOP, 24-Leads, Body 7.80x4.40mm, Pitch 0.65mm, IPC Medium Density"
  oval 1.55x0.35 smd: 1(-2.875,3.575) 2(-2.875,2.925) 3(-2.875,2.275) 4(-2.875,1.625) 5(-2.875,0.975) 6(-2.875,0.325) 7(-2.875,-0.325) 8(-2.875,-0.975) 9(-2.875,-1.625) 10(-2.875,-2.275) 11(-2.875,-2.925) 12(-2.875,-3.575) 13(2.875,-3.575) 14(2.875,-2.925) 15(2.875,-2.275) 16(2.875,-1.625) 17(2.875,-0.975) 18(2.875,-0.325) 19(2.875,0.325) 20(2.875,0.975) 21(2.875,1.625) 22(2.875,2.275) 23(2.875,2.925) 24(2.875,3.575)
  silkscreen extent -3,-3.95 1.7,4.42, body extent -2.25,-3.95 2.25,3.95, height 2.65
ADuM4160 [mm] "SOIC, 16-Leads, Body 10.30x7.50mm, Pitch 1.27mm, IPC Medium Density"
  oval 2.3x0.6 smd: 1(-4.575,4.445) 2(-4.575,3.175) 3(-4.575,1.905) 4(-4.575,0.635) 5(-4.575,-0.635) 6(-4.575,-1.905) 7(-4.575,-3.175) 8(-4.575,-4.445) 9(4.575,-4.445) 10(4.575,-3.175) 11(4.575,-1.905) 12(4.575,-0.635) 13(4.575,0.635) 14(4.575,1.905) 15(4.575,3.175) 16(4.575,4.445)
  silkscreen extent -4.7,-5.25 3.03,5.42, body extent -3.8,-5.25 3.8,5.25, height 2.65
BLM18PG121SN1D [mm] "Chip Inductor, 2-Leads, Body 1.0x0.5mm, IPC Medium Density"
  rect 0.8x0.6 smd: 1(-0.6,0) 2(0.6,0)
  body extent -0.52,-0.28 0.53,0.27, height 0.6
C1206 [mm] "Chip Capacitor, Body 3.2x1.6mm, IPC High Density"
  rect 1.1x1.7 smd: 1(-1.35,0) 2(1.35,0)
  silkscreen extent -0.4,-0.75 0.4,0.75, body extent -1.7,-0.9 1.7,0.9, height 1.3
C1210 [mm] "Chip Capacitor, Body 3.2x2.5mm, IPC High Density"
  rect 1.1x2.6 smd: 1(-1.35,0) 2(1.35,0)
  silkscreen extent -0.4,-1.2 0.4,1.2, body extent -1.7,-1.35 1.7,1.35, height 1.3
CIP0530LR3R3 [mm] "Precision Wire Wound Inductor, 2-Leads, Body 5.58x5.30mm, IPC Medium Density"
  rect 2.55x2.7 smd: 1(-2.175,0) 2(2.175,0)
  silkscreen extent -2.9,-2.7 2.9,2.7, body extent -2.88,-2.7 2.88,2.7, height 2.29
con-phoenix-508-6 [mm] "con-phoenix-508"
  oval 3x2 hole 1.4: 1(0,25.4) 2(0,20.32) 3(0,15.24) 4(0,10.16) 5(0,5.08) 6(0,0)
  silkscreen extent -2,-3.54 10,28.94
DRV8825 [mm] "TSOP, 28-Leads, Body 9.70x4.40mm, Pitch 0.65mm, Thermal Pad 5.22.2x3.10.2mm, IPC Medium Density"
  oval 1.7x0.35 smd: 1(-2.85,4.225) 2(-2.85,3.575) 3(-2.85,2.925) 4(-2.85,2.275) 5(-2.85,1.625) 6(-2.85,0.975) 7(-2.85,0.325) 8(-2.85,-0.325) 9(-2.85,-0.975) 10(-2.85,-1.625) 11(-2.85,-2.275) 12(-2.85,-2.925) 13(-2.85,-3.575) 14(-2.85,-4.225) 15(2.85,-4.225) 16(2.85,-3.575) 17(2.85,-2.925) 18(2.85,-2.275) 19(2.85,-1.625) 20(2.85,-0.975) 21(2.85,-0.325) 22(2.85,0.325) 23(2.85,0.975) 24(2.85,1.625) 25(2.85,2.275) 26(2.85,2.925) 27(2.85,3.575) 28(2.85,4.225)
  rect 3.1x5.22 smd: 29(0,0)
  silkscreen extent -2.97,-4.9 1.6,5.07, body extent -2.25,-4.9 2.25,4.9, height 1.2
F1210_M [mm] "Bournes PTC Fuse"
  rect 1x2.5 smd: 1(-1.5,0) 2(1.5,0)
  silkscreen extent -0.4,-1.3 0.4,1.3, body extent -1.7,-1.35 1.7,1.4, height 0.85
HDR1X2 [mm] "Connector; Header; 2 Position"
  rect 1.5x1.5 hole 0.9: 1(0,0)
  round 1.5 hole 0.9: 2(2.54,0)
  silkscreen extent -1.27,-1.27 3.81,1.27
HDR1X3 [mm] "Connector; Header; 3 Position"
  rect 1.5x1.5 hole 0.9: 1(0,0)
  round 1.5 hole 0.9: 2(2.54,0) 3(5.08,0)
  silkscreen extent -1.27,-1.27 6.35,1.27
HDR1X5 [mm] "Connector; Header; 5 Position"
  rect 1.5x1.5 hole 0.9: 1(0,0)
  round 1.5 hole 0.9: 2(2.54,0) 3(5.08,0) 4(7.62,0) 5(10.16,0)
  silkscreen extent -1.27,-1.27 11.43,1.27
HDR2X20 [mm] "Connector; Header; 20x2 Position"
  rect 1.5x1.5 hole 0.9: 1(0,0)
  round 1.5 hole 0.9: 2(0,2.54) 3(2.54,0) 4(2.54,2.54) 5(5.08,0) 6(5.08,2.54) 7(7.62,0) 8(7.62,2.54) 9(10.16,0) 10(10.16,2.54) 11(12.7,0) 12(12.7,2.54) 13(15.24,0) 14(15.24,2.54) 15(17.78,0) 16(17.78,2.54) 17(20.32,0) 18(20.32,2.54) 19(22.86,0) 20(22.86,2.54) 21(25.4,0) 22(25.4,2.54) 23(27.94,0) 24(27.94,2.54) 25(30.48,0) 26(30.48,2.54) 27(33.02,0) 28(33.02,2.54) 29(35.56,0) 30(35.56,2.54) 31(38.1,0) 32(38.1,2.54) 33(40.64,0) 34(40.64,2.54) 35(43.18,0) 36(43.18,2.54) 37(45.72,0) 38(45.72,2.54) 39(48.26,0) 40(48.26,2.54)
  silkscreen extent -1.27,-1.27 49.53,3.81
IRLML6346 [mm] "SOT23, 3-Leads, Body 2.92x2.37mm, Pitch 0.95mm, IPC Medium Density"
  rect 1.6x0.6 smd: 1(-0.9,0.95) 2(-0.9,-0.95) 3(0.9,0)
  silkscreen extent -1.02,-1.5 0.7,1.92, body extent -0.7,-1.52 0.7,1.52, height 1.12
J1-0603 [mm] "Chip Resistor, Body 1.6x0.8mm, IPC High Density"
  rect 0.7x0.9 smd: 1(-0.75,0) 2(0.75,0)
  silkscreen extent -0.2,-0.35 0.2,0.35, body extent -0.85,-0.48 0.85,0.48, height 0.9
LQFP144_N [mm] "Thin QFP, 144-Leads, Body 20x20mm, Pitch 0.5mm, IPC Medium Density"
  oval 1.8x0.3 smd: 1(-10.55,8.75) 2(-10.55,8.25) 3(-10.55,7.75) 4(-10.55,7.25) 5(-10.55,6.75) 6(-10.55,6.25) 7(-10.55,5.75) 8(-10.55,5.25) 9(-10.55,4.75) 10(-10.55,4.25) 11(-10.55,3.75) 12(-10.55,3.25) 13(-10.55,2.75) 14(-10.55,2.25) 15(-10.55,1.75) 16(-10.55,1.25) 17(-10.55,0.75) 18(-10.55,0.25) 19(-10.55,-0.25) 20(-10.55,-0.75) 21(-10.55,-1.25) 22(-10.55,-1.75) 23(-10.55,-2.25) 24(-10.55,-2.75) 25(-10.55,-3.25) 26(-10.55,-3.75) 27(-10.55,-4.25) 28(-10.55,-4.75) 29(-10.55,-5.25) 30(-10.55,-5.75) 31(-10.55,-6.25) 32(-10.55,-6.75) 33(-10.55,-7.25) 34(-10.55,-7.75) 35(-10.55,-8.25) 36(-10.55,-8.75) 73(10.55,-8.75) 74(10.55,-8.25) 75(10.55,-7.75) 76(10.55,-7.25) 77(10.55,-6.75) 78(10.55,-6.25) 79(10.55,-5.75) 80(10.55,-5.25) 81(10.55,-4.75) 82(10.55,-4.25) 83(10.55,-3.75) 84(10.55,-3.25) 85(10.55,-2.75) 86(10.55,-2.25) 87(10.55,-1.75) 88(10.55,-1.25) 89(10.55,-0.75) 90(10.55,-0.25) 91(10.55,0.25) 92(10.55,0.75) 93(10.55,1.25) 94(10.55,1.75) 95(10.55,2.25) 96(10.55,2.75) 97(10.55,3.25) 98(10.55,3.75) 99(10.55,4.25) 100(10.55,4.75) 101(10.55,5.25) 102(10.55,5.75) 103(10.55,6.25) 104(10.55,6.75) 105(10.55,7.25) 106(10.55,7.75) 107(10.55,8.25) 108(10.55,8.75)
  oval 0.3x1.8 smd: 37(-8.75,-10.55) 38(-8.25,-10.55) 39(-7.75,-10.55) 40(-7.25,-10.55) 41(-6.75,-10.55) 42(-6.25,-10.55) 43(-5.75,-10.55) 44(-5.25,-10.55) 45(-4.75,-10.55) 46(-4.25,-10.55) 47(-3.75,-10.55) 48(-3.25,-10.55) 49(-2.75,-10.55) 50(-2.25,-10.55) 51(-1.75,-10.55) 52(-1.25,-10.55) 53(-0.75,-10.55) 54(-0.25,-10.55) 55(0.25,-10.55) 56(0.75,-10.55) 57(1.25,-10.55) 58(1.75,-10.55) 59(2.25,-10.55) 60(2.75,-10.55) 61(3.25,-10.55) 62(3.75,-10.55) 63(4.25,-10.55) 64(4.75,-10.55) 65(5.25,-10.55) 66(5.75,-10.55) 67(6.25,-10.55) 68(6.75,-10.55) 69(7.25,-10.55) 70(7.75,-10.55) 71(8.25,-10.55) 72(8.75,-10.55) 109(8.75,10.55) 110(8.25,10.55) 111(7.75,10.55) 112(7.25,10.55) 113(6.75,10.55) 114(6.25,10.55) 115(5.75,10.55) 116(5.25,10.55) 117(4.75,10.55) 118(4.25,10.55) 119(3.75,10.55) 120(3.25,10.55) 121(2.75,10.55) 122(2.25,10.55) 123(1.75,10.55) 124(1.25,10.55) 125(0.75,10.55) 126(0.25,10.55) 127(-0.25,10.55) 128(-0.75,10.55) 129(-1.25,10.55) 130(-1.75,10.55) 131(-2.25,10.55) 132(-2.75,10.55) 133(-3.25,10.55) 134(-3.75,10.55) 135(-4.25,10.55) 136(-4.75,10.55) 137(-5.25,10.55) 138(-5.75,10.55) 139(-6.25,10.55) 140(-6.75,10.55) 141(-7.25,10.55) 142(-7.75,10.55) 143(-8.25,10.55) 144(-8.75,10.55)
  silkscreen extent -10.67,-9.25 9.25,9.57, body extent -10,-10 10,10, height 1.6
MAXM-S8+4_N [mm] "SOIC, 8-Leads, Body 4.9x3.9mm, Pitch 1.27mm, IPC Medium Density"
  oval 2.2x0.6 smd: 1(-2.4,1.905) 2(-2.4,0.635) 3(-2.4,-0.635) 4(-2.4,-1.905) 5(2.4,-1.905) 6(2.4,-0.635) 7(2.4,0.635) 8(2.4,1.905)
  silkscreen extent -2.53,-2.5 0.9,2.88, body extent -2,-2.5 2,2.5, height 1.75
MIC24085-AYML [mm] "QFN, 16-Leads, Body 3.25x3.25mm, Pitch 0.50mm, Thermal Pad 1.73x1.73mm, IPC Medium Density"
  oval 0.8x0.25 smd: 1(-1.7,0.75) 2(-1.7,0.25) 3(-1.7,-0.25) 4(-1.7,-0.75) 9(1.7,-0.75) 10(1.7,-0.25) 11(1.7,0.25) 12(1.7,0.75)
  oval 0.25x0.8 smd: 5(-0.75,-1.7) 6(-0.25,-1.7) 7(0.25,-1.7) 8(0.75,-1.7) 13(0.75,1.7) 14(0.25,1.7) 15(-0.25,1.7) 16(-0.75,1.7)
  rect 1.73x1.73 smd: 17(0,0)
  silkscreen extent -2.67,-1.9 1.9,1.9, body extent -1.75,-1.75 1.75,1.75, height 0.85
"Panasonic VS C" [mm]
  rect 3x1.4 smd: 1(5.348,2.921) 2(0.748,2.921)
  silkscreen extent 0.05,0.22 6.05,5.62, body extent 0.1,0.29 6,5.59, height 5.41
"Panasonic VS D" [mm]
  rect 3.4x1.4 smd: 1(2.6,0) 2(-2.6,0)
  silkscreen extent -3,-3.2 3,3.2, body extent -3.5,-3.3 3.5,3.3, height 5.4
PMEG1030EH_EJ [mm] "Molded Diode, 2-Leads, Body 2.60x1.60mm, IPC Medium Density"
  rect 1.3x0.65 smd: 1(-1.225,0) 2(1.225,0)
  silkscreen extent -1.4,-0.85 1.85,0.85, body extent -1.35,-0.85 1.35,0.85, height 1.2
PN61729 [mil]
  oct 66x66 hole 38: 1(50,186) 2(-49.21,186) 3(-49.21,107) 4(50,107)
  round 130.5 hole 87: 5(-236.22,0) 6(237,0)
  silkscreen extent -232,-400 233,221, body extent -237,-405 238,226, height 406
PSMN7R0-60YS [mm] "TO, 5-Pads, Body 5.15x5.86mm (max), IPC Medium Density"
  rect 1.8x0.6 smd: 1(-2.6,1.905) 2(-2.6,0.635) 3(-2.6,-0.635) 4(-2.6,-1.905)
  rect 4.8x4.5 smd: 5(1.14,0)
  silkscreen extent -2.72,2.63 -2.47,2.88, body extent -1.85,-2.5 2.25,2.5, height 1.2
Resistor2512 [mm]
  rect 1.6x3.1 smd: 1(-3.25,0) 2(3.25,0)
  silkscreen extent -2.26,-1.3 2.26,1.3, body extent -3.24,-1.4 3.24,1.4, height 0.9
RGT16-1700X1700TP [mm] "QFN, 16-Leads, Body 3x3mm, Pitch 0.5mm, Thermal Pad 1.7x1.7mm, TI Recommended"
  oval 0.85x0.28 smd paste-0.025 mask+0.07: 1(-1.475,0.75) 2(-1.475,0.25) 3(-1.475,-0.25) 4(-1.475,-0.75) 9(1.475,-0.75) 10(1.475,-0.25) 11(1.475,0.25) 12(1.475,0.75)
  oval 0.28x0.85 smd paste-0.025 mask+0.07: 5(-0.75,-1.475) 6(-0.25,-1.475) 7(0.25,-1.475) 8(0.75,-1.475) 13(0.75,1.475) 14(0.25,1.475) 15(-0.25,1.475) 16(-0.75,1.475)
  rect 1.7x1.7 smd paste-0.85 mask+0.07: 17(0,0)
  silkscreen extent -2.5,-1.73 1.73,1.73, body extent -1.57,-1.57 1.58,1.58, height 1
S9015E-05-ND [mm] "10 Pin Cortex JTAG Debug Header"
  round 1.1 hole 0.508: 1(5.08,0) 2(5.08,-1.27) 3(3.81,0) 4(3.81,-1.27) 5(2.54,0) 6(2.54,-1.27) 7(1.27,0) 8(1.27,-1.27) 9(0,0) 10(0,-1.27)
  round 0.5 on Top Overlay: 1(7,0.8)
  silkscreen extent -1.25,-2.5 6.5,1.25
SK310A-TP [mm] "Molded Diode, 2-Leads, Body 4.31x2.69mm, IPC Medium Density"
  rect 2.3x2.15 smd: 1(-1.625,0) 2(1.625,0)
  silkscreen extent -2.3,-1.45 3.07,1.75, body extent -2.29,-1.42 2.28,1.42, height 2.95
"SM 0805 - gap trimmed" [mm]
  rect 1x1.5 smd: 1(-1.1,0) 2(1.1,0)
  silkscreen extent -0.36,-0.64 0.35,0.63
"SM 0805 polarized" [mm]
  rect 1x1.5 smd: 1(0.93,-1.105) 2(3.13,-1.105)
  silkscreen extent 0.1,-1.9 2.38,-0.3
SMB [mm] "DO-214-AA/SMB; 2 C-Bend Leads; Body 5.3 x 3.6 mm, inc. leads (LxW)"
  rect 2.3x2.3 smd: 1(-2.25,0) 2(2.25,0)
  silkscreen extent -3.8,-1.55 4.1,1.55
SZMM3Z4V7T1G [mm] "Molded Diode, 2-Leads, Body 1.70x1.25mm, IPC Medium Density"
  rect 0.9x0.35 smd: 1(-1,0) 2(1,0)
  silkscreen extent -0.95,-0.7 1.4,0.7, body extent -0.9,-0.67 0.9,0.67, height 1
TL3301 [mm]
  rect 1.4x2.1 smd: 1(-2.3,-4.5) 1(-2.3,4.5) 2(2.3,-4.5) 2(2.3,4.5)
  silkscreen extent -2.2,-2.4 2.2,2.4
VLS252012T-2R2M1R3 [mm] "Precision Wire Wound Inductor, 2-Leads, Body 2.5x2.0mm, IPC Medium Density"
  rect 1.65x2.1 smd: 1(-1.025,0) 2(1.025,0)
  body extent -1.3,-1.05 1.3,1.05, height 1.2

## Part data
C1_EndstopChannel1 C1_EndstopChannel2 C1_EndstopChannel3 C2_EndstopChannel1 C2_EndstopChannel2 C2_EndstopChannel3 C4 C5 C6 C9 C14 C15 C17 C18 C19 C20 C21 C22 C23 C24 C25 C26 C32 C33 C36 C37 C38 C39 C40 C41 C42 C43 C44 C45 C46 C47 C48 C49 C50 C51 C54 C55 C56 C57 C58 C59 C64 C65 C66_DriverChannelDRV88251 C66_DriverChannelDRV88252 C66_DriverChannelDRV88253 C66_DriverChannelDRV88254 C66_DriverChannelDRV88255 C68_DriverChannelDRV88251 C68_DriverChannelDRV88252 C68_DriverChannelDRV88253 C68_DriverChannelDRV88254 C68_DriverChannelDRV88255 C71_DriverChannelDRV88251 C71_DriverChannelDRV88252 C71_DriverChannelDRV88253 C71_DriverChannelDRV88254 C71_DriverChannelDRV88255: library part "Cap Semi", "Capacitor (Semiconductor SIM Model)"
C3 C12 C16 C69_DriverChannelDRV88251 C69_DriverChannelDRV88252 C69_DriverChannelDRV88253 C69_DriverChannelDRV88254 C69_DriverChannelDRV88255 C70_DriverChannelDRV88251 C70_DriverChannelDRV88252 C70_DriverChannelDRV88253 C70_DriverChannelDRV88254 C70_DriverChannelDRV88255: library part "Cap Pol1", "Polarized Capacitor (Radial)"
C7 C8 C10 C11 C13 C31_ThermocoupleChannel1 C31_ThermocoupleChannel2 C60 C61 C62 C63: "Capacitor (Semiconductor SIM Model)"
D1: library part "D Zener", "Zener Diode"
D4 D6 D8 D12 D15 D17 D19: library part "D Schottky", "Schottky Diode"
D5: "Default Diode"
D7 D9: "Typical RED, GREEN, YELLOW, AMBER GaAs LED"
D10 D11 D13 D14 D16 D18: "Typical RED GaAs LED"
DBGEN1 "FET kRESET" "FET MCU RESET" kRESET TRST1: "Header, 2-Pin"
EXP0: "Header, 20-Pin, Dual row"
F1 F2 F3 F4: library part "Fuse 1", "Fuse"
FB4 FB9 L2: library part Inductor, "Inductor"
"Logic Source1" SPD1: "Header, 3-Pin"
M1_DriverChannelDRV88251 M1_DriverChannelDRV88252 M1_DriverChannelDRV88253 M1_DriverChannelDRV88254 M1_DriverChannelDRV88255: library part "Molex 0705430003 Alt", "Molex 4 Pin Clip Connector"
MAX1_EndstopChannel1 MAX1_EndstopChannel2 MAX1_EndstopChannel3 MIN1_EndstopChannel1 MIN1_EndstopChannel2 MIN1_EndstopChannel3: library part "Molex Endstop"
P3_DriverChannelDRV88251 P3_DriverChannelDRV88252 P3_DriverChannelDRV88253 P3_DriverChannelDRV88254 P3_DriverChannelDRV88255: "Header, 5-Pin"
Q2 Q3 Q4 Q5 Q6 Q7: "N-Channel MOSFET"
R1 R7 R8 R9 R10 R11 R21 R23 R31: "Resistor"
R2_EndstopChannel1 R2_EndstopChannel2 R2_EndstopChannel3 R3_EndstopChannel1 R3_EndstopChannel2 R3_EndstopChannel3 R12 R13 R14 R15 R16 R17 R18 R19 R20 R22 R24 R25 R26 R27 R28 R29 R30_DriverChannelDRV88251 R30_DriverChannelDRV88252 R30_DriverChannelDRV88253 R30_DriverChannelDRV88254 R30_DriverChannelDRV88255 R32_DriverChannelDRV88251 R32_DriverChannelDRV88252 R32_DriverChannelDRV88253 R32_DriverChannelDRV88254 R32_DriverChannelDRV88255 R33_DriverChannelDRV88251 R33_DriverChannelDRV88252 R33_DriverChannelDRV88253 R33_DriverChannelDRV88254 R33_DriverChannelDRV88255 R37 R38 R39 R40 R41 R42 R43 R44 R45 R46 R47 R48 R49 R50 R51 R52 R53 R54 R55 R56 R57 R58 R59 R60 R61 R62 R63 R64 R65 R66 R67 R68 R69 R70 R71: library part Res3, "Resistor"
U2: "Buck Step Down Regulator with 3 to 17 V Input and 3.3 V Output, -40 to 85 degC, 16-Pin QFN (RGT), Green (RoHS & no Sb/Br)"
U4_ThermocoupleChannel1 U4_ThermocoupleChannel2: "Cold Junction Compensated Thermocouple to Digital Converter, 14 Bits Temperature Resolution, -40 to 125 degC, 8-Pin SOIC (S8+4), Pb-Free"
U5: library part ATML-ATSAM4EXEA-LQFP-144
U6: "USB Opto Isolator"
U7_DriverChannelDRV88251 U7_DriverChannelDRV88252 U7_DriverChannelDRV88253 U7_DriverChannelDRV88254 U7_DriverChannelDRV88255: "DRV8825 Ti Stepper Driver"
U10: library part "A3944 - MOSFET Low Side Driver", "Allegro Micro A3944 MOST Driver (low side)"
X2: library part XTAL, "Crystal Oscillator"

## Free pads (board coordinates)
  rect 150x150 hole 100: ""(130,3865) ""(140,135) ""(5870,130) ""(5870,3870)

## Via types
v1: diameter 30, hole 15, Top Layer to Bottom Layer, 1265 vias
v2: diameter 25, hole 15, Top Layer to Bottom Layer, 405 vias
v3: diameter 19.68, hole 7.87, Top Layer to Bottom Layer, 90 vias
v4: diameter 50, hole 20, Top Layer to Bottom Layer, 28 vias
v5: diameter 30, hole 20, Top Layer to Bottom Layer, 2 vias

## Nets (pads, with @x,y where several pads share a name; then routed paths per layer and width w, separated by ;. In a path a pad name is that pad's centre, name@x,y a point inside that pad or via, vN(x,y) a via of type N, cw(c..) or ccw(c..) an arc to the next point about the centre after c; other vN are vias at no path point)
3.3VCC: C4.1 C23.1 C25.2 C26.1 C31_ThermocoupleChannel1.2 C31_ThermocoupleChannel2.2 C45.2 C46.2 C47.2 C48.2 C49.2 C50.2 C51.2 C60.2 C61.2 C62.2 DBGEN1.1 EXP0.5 EXP0.7 FB5.1 JTAG/DEBUG1.1@3330,1785 L2.2 MAX1_EndstopChannel1.3 MAX1_EndstopChannel2.3 MAX1_EndstopChannel3.3 MIN1_EndstopChannel1.3 MIN1_EndstopChannel2.3 MIN1_EndstopChannel3.3 P3_DriverChannelDRV88251.1 P3_DriverChannelDRV88252.1 P3_DriverChannelDRV88253.1 P3_DriverChannelDRV88254.1 P3_DriverChannelDRV88255.1 R2_EndstopChannel1.1 R2_EndstopChannel2.1 R2_EndstopChannel3.1 R3_EndstopChannel1.1 R3_EndstopChannel2.1 R3_EndstopChannel3.1 R11.2 R12.2 R21.2 R24.2 R25.2 R26.2 R27.2 R37.2 SPD1.1 TRST1.1 U2.14 U4_ThermocoupleChannel1.4 U4_ThermocoupleChannel2.4 U5.30 U5.43 U5.72 U5.80 U5.96 U5.134 U5.143 U7_DriverChannelDRV88251.17 U7_DriverChannelDRV88252.17 U7_DriverChannelDRV88253.17 U7_DriverChannelDRV88254.17 U7_DriverChannelDRV88255.17 U10.28 | length 6222.4
  Top Layer w10: R2_EndstopChannel2.1@865,75.95 924.05,75.95 v1(925,75) ; R3_EndstopChannel2.1@865,350 v1(865,390) ; R2_EndstopChannel3.1@865,535.95 865,535 880,520 v1(925,520) ; R3_EndstopChannel3.1@865,850 v1(865,890) ; R2_EndstopChannel1.1@865,1035.95 865,1035 880,1020 v1(925,1020) ; R3_EndstopChannel1.1@865,1350 v1(865,1390) ; v2(1677.56,1900) C45.2@1677.56,1857.56 1696.5,1838.62 U5.30@1934.65,1838.62 ; v2(1942.56,2467.56) C51.2@1942.56,2510 1942.56,2527.56 1955,2540 2008.99,2540 2025.2,2523.79 U5.143@2025.2,2480.35 ; v2(2107.44,1487.44) C46.2@2107.44,1530 2123.62,1546.18 U5.43@2123.62,1649.65 ; U5.134@2202.36,2480.35 2202.36,2572.82 2190,2585.19 C50.2@2190,2625 v2(2227.56,2625) ; v2(2694.49,1535.51) U5.72@2694.49,1649.65 ; U5.80@2765.35,1858.31 2852.67,1858.31 2865.98,1845 2947.56,1845 2965,1827.56 C48.2@2982.44,1827.56 ; U5.96@2765.35,2173.27 2966.73,2173.27 C49.2@2967.44,2172.56 v2(2967.44,2215.12) ; C48.2@2980,1830 v2(2980,1872.56) ; R26.2@3005.47,2114.53 v2(3050,2114.53) ; v2(3100,1840) R25.2@3140.47,1840 ; v2(3110,2315) R21.2@3150.47,2315 ; v2(3175,1685) R24.2@3175,1720.47 ; R27.2@3195,1999.53 v2(3195,2040) ; JTAG/DEBUG1.1@3330,1785 3330,1682.44 C62.2@3322.56,1675 3327.56,1670 v2(3370,1670) ; 3810,3089.53 3815.47,3095 v1(3855,3095) ; 3810,3664.53 3815.47,3670 v1(3855,3670) ; TRST1.1@4045.47,1794.53 4095.47,1794.53 4113.03,1812.09 C61.2@4130.47,1812.09 v2(4130.47,1854.53) ; DBGEN1.1@4470.39,1799.45 4536.89,1799.45 C60.2@4560,1822.56 ; v2(4969.58,2234.31) 4993.47,2234.31 5003.62,2224.15 U2.14@5018.51,2224.15 ; v2(5132.58,2016.31) R12.2@5132.58,2052.78 ; v2(5211.58,2068.31) R37.2@5211.58,2104.78
  Top Layer w14: U7_DriverChannelDRV88251.17@1820,1067.36 v1(1820,1145) ; U7_DriverChannelDRV88252.17@2745,1067.36 v1(2745,1145) ; U7_DriverChannelDRV88253.17@3670,1067.36 v1(3670,1145) ; U7_DriverChannelDRV88254.17@4595,1067.36 v1(4595,1145) ; U7_DriverChannelDRV88255.17@5520,1067.36 v1(5520,1145)
  Top Layer w15: v1(3380.51,3105) 3422.95,3105 3422.95,3072.56 3439.49,3056.02 U4_ThermocoupleChannel2.4@3439.49,3045 ; v1(3380.51,3680) 3422.95,3680 3422.95,3647.56 3439.49,3631.02 U4_ThermocoupleChannel1.4@3439.49,3620
  Bottom Layer w10: SPD1.1@1250,3000 1250,2430 v2(1345,2335) ; v1(3380.51,3105) 3400.51,3085 3590,3085 3600,3095 v1(3855,3095) ; v1(3855,3670) v1(3855,3095) ; 3960,2990 v1(3855,3095) ; v2(4926.58,2055.31) 4965.58,2016.31 v2(5132.58,2016.31) 5180.58,2016.31 5211.58,2047.31 v2(5211.58,2068.31) ; v2(4969.58,2141.31) v2(4969.58,2234.31)
  Bottom Layer w15: v1(3380.51,3105) 3380.51,3130.51 3442.13,3192.13 3444.96,3192.13 3465,3212.17 3465,3300 3380.51,3384.49 v1(3380.51,3680)
+5VCC: "Logic Source1.3" C8.2 C9.1 EXP0.1 EXP0.3 L1.2 R7.2 R8.2 R9.1 U1.9 | length 8779
  Top Layer w8: U1.9@5799.53,2166.93 5799.53,2178.31 5815,2193.79 5815,2220 5835,2240 v2(5835,2275)
  Top Layer w10: R7.2@5895,2199.53 v2(5895,2275) R9.1@5895,2324.53
  Bottom Layer w10: v5(5485,2250) 5555,2250 5580,2275 v2(5895,2275)
  Bottom Layer w40: EXP0.1@200,305 EXP0.3@200,405 271,476 1069,476 1180,365 1180,150 1265,65 5585,65 5650,130 5650,225 5619,256 5619,519 5670,570 5670,760 5755,845 5840,845 5920,925 5920,1720 5845,1795 v4@5520,1795
  other v2: 5295,1795 5325,1795 5355,1795 5295,1825 5325,1825 5355,1825 5295,1855 5325,1855 5295,1885 5325,1885 5295,1915 5325,1915 5295,1945 5325,1945 5295,1975 5325,1975 5295,2005 5325,2005 5295,2035 5325,2035 5295,2065 5325,2065
  other v4: 5515,1795